# Altium PCB PCB1.PcbDoc
Units mm, origin at the board's own origin, x right, y up, seen from the top; angles counter-clockwise.
Board outline 81.23 x 45.54 mm, 2 copper layers (Top Layer, Bottom Layer); 23 components, 19 nets, 63 pads, 0 vias.
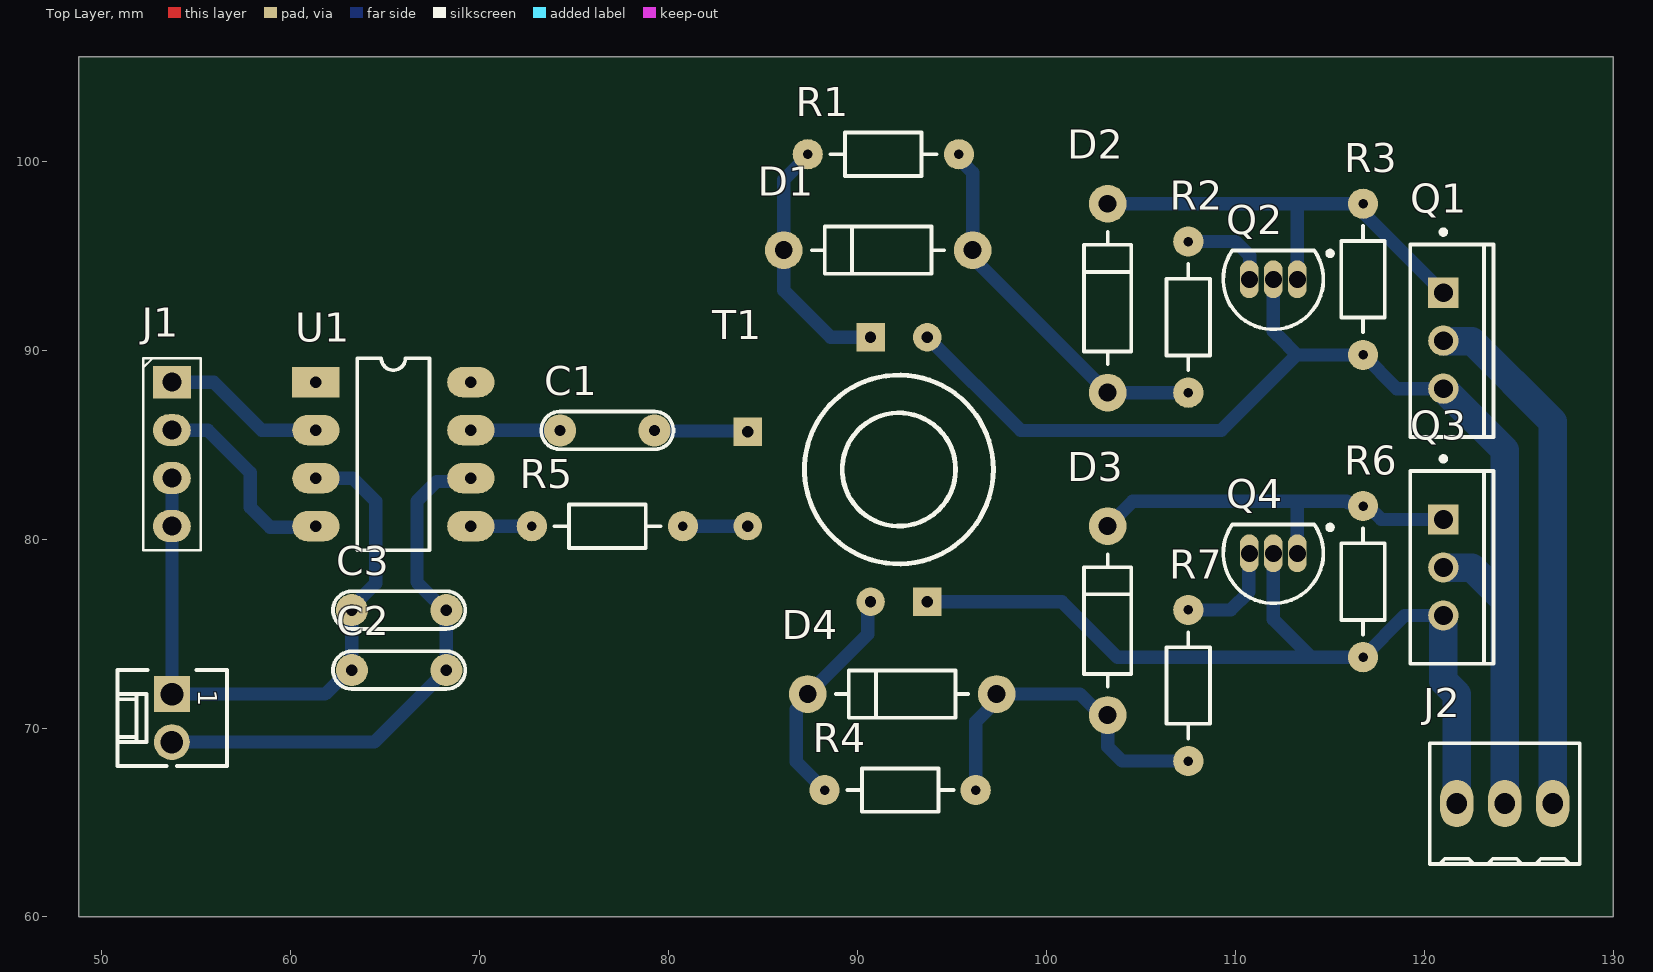
[diagram p0: Top Layer view]
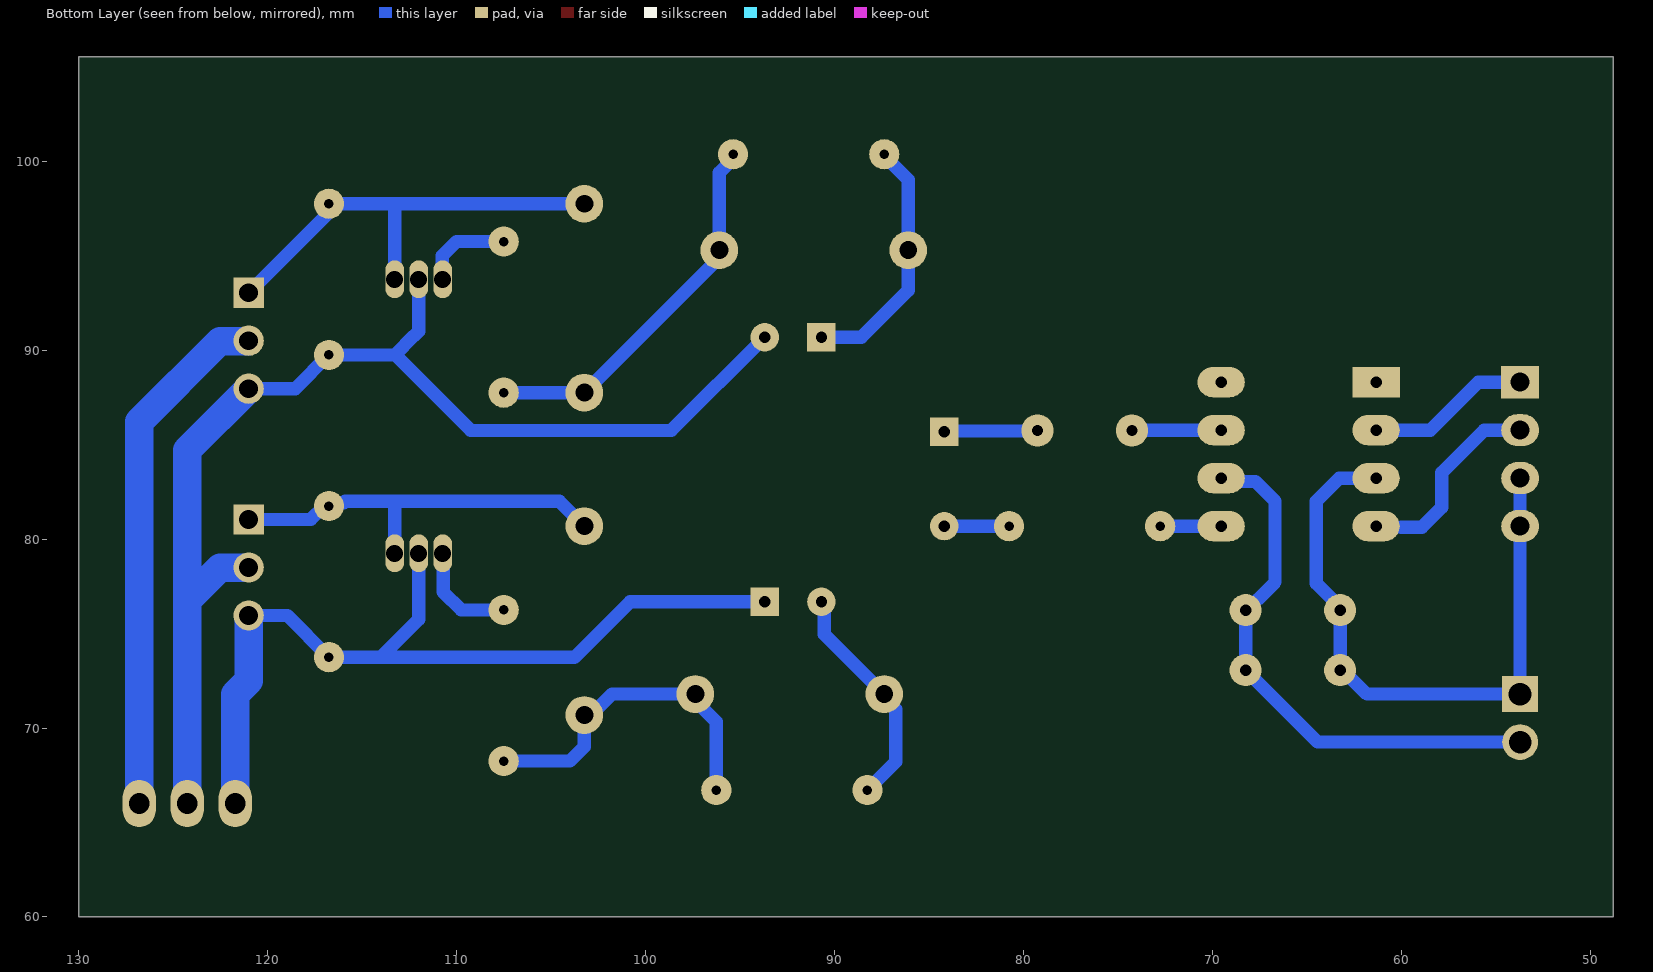
[diagram p1: Bottom Layer view, seen from below]

## Layer stack, top to bottom
Top Solder: solder mask 0.0102, Solder Resist, Dk 3.5
Top Layer: signal copper 0.0356
Dielectric 1: dielectric 0.32, FR-4, Dk 4.8
Bottom Layer: signal copper 0.0356
Bottom Solder: solder mask 0.0102, Solder Resist, Dk 3.5

## Board outline
48.768,60 48.768,105.537 130,105.537 130,60

## Design rules (kind name [scope] priority, off if disabled: settings)
Clearance [All] p1: gap=0.4 ignorepadtopadclearanceinfootprint=TRUE
PolygonConnect [All] p1: connectstyle=Relief reliefconductorwidth=0.254 reliefentries=4 polygonreliefangle="90 Angle" airgapwidth=0.5
RoutingVias [All] p1: holewidth=0.711 width=1.27 viastyle="Through Hole" minholewidth=0.711 minwidth=1.27 maxholewidth=0.711 maxwidth=1.27
SolderMaskExpansion [All] p1: expansion=0.102 istentingtop=FALSE
Width [All] p1: maxlimit=2 minlimit=0.7 preferedwidth=0.8
30 further rules are at their usual default settings.

## Components (designator, comment, footprint, x,y, rotation, side; value= is the part's Value field where it differs from the comment)
C1 "CAP_THT_0805" Cap_THT_0805 74.25,85.75 r0 top value=1u
C2 "CAP_THT_0805" Cap_THT_0805 63.23,73.065 r0 top value=1u
C3 "CAP_THT_0805" Cap_THT_0805 63.23,76.24 r0 top value=0.1u
D1 "1N5819" DO-41 96.09,95.29 r180 top
D2 "1N5819" DO-41 103.235,87.75 r90 top
D3 "1N5819" DO-41 103.235,70.685 r90 top
D4 "1N5819" DO-41 97.36,71.795 r180 top
J1 "Header 1x4 2.54mm" "Header 1x4 2.54mm" 53.705,88.305 r270 top
J2 "282834-3" "TE 282834-3" 124.25,66 r180 top
Q1 "IRFB18N50KPBF" TO-220 121,93.04 r0 top
Q2 "C2331" TO-92 113.27,93.75 r90 top
Q3 "IRFB18N50KPBF" TO-220 121,81.04 r0 top
Q4 "C2331" TO-92 113.27,79.25 r90 top
R1 "RES" RES_0.25W 87.36,100.37 r0 top value=8
R2 "RES" RES_0.25W 107.5,87.75 r90 top value=1k
R3 "RES" RES_0.25W 116.75,89.75 r90 top value=10k
R4 "RES" RES_0.25W 88.25,66.715 r0 top value=8
R5 "RES" RES_0.25W 72.755,80.685 r0 top value=0
R6 "RES" RES_0.25W 116.75,73.75 r90 top value=10k
R7 "RES" RES_0.25W 107.5,68.25 r90 top value=1k
T1 "NxNxN" Trans2 92.185,83.685 r0 top
U1 "IR4427PBF" DIP8 61.325,88.305 r0 top
? "KK®" MOLEX_22-27-2021 53.705,70.525 r270 top

## Footprints (in the part's own frame and the unit in brackets; to place one, negate y for a bottom-side part, rotate by r counter-clockwise, add the part's x,y. Pads: shape width x height; smd on the part's side, far side on the other; paste and mask are expansions set on the pad)
Cap_THT_0805 [mm]
  round 1.7 hole 0.6: 1(0,0) 2(5,0)
  silkscreen extent -1,-1 6,1
DIP8 [mm]
  rect 2.5x1.6 hole 0.6: 1(0,0)
  oval 2.5x1.6 hole 0.6: 2(0,-2.54) 3(0,-5.08) 4(0,-7.62) 5(8.2,-7.62) 6(8.2,-5.08) 7(8.2,-2.54) 8(8.2,0)
  silkscreen extent 2.18,-8.89 6.01,1.27, body extent -0.15,-8.64 8.42,1.02, height 4.45
DO-41 [mm]
  round 2 hole 0.95: A(0,0) K(10,0)
  silkscreen extent 1.5,-1.25 8.5,1.25
"Header 1x4 2.54mm" [mm]
  rect 1.7x2 hole 1: 1(0,0)
  oval 1.7x2 hole 1: 2(2.54,0) 3(5.08,0) 4(7.62,0)
  silkscreen extent -1.27,-1.52 8.89,1.52, body extent -1.27,-1.27 8.89,1.27, height 8.54
MOLEX_22-27-2021 [mm] "2.54mm (.100\") Pitch KK® Header, Single Row, Vertical, 2 Circuits"
  rect 1.9x1.9 hole 1.2: 1(-1.27,0.002)
  round 1.9 hole 1.2: 2(1.27,-0.002)
  silkscreen extent -2.54,-2.88 2.54,2.92, body extent -2.54,-2.88 2.54,2.92, height 11.7
RES_0.25W [mm]
  round 1.6 hole 0.5: 1(0,0) 2(8,0)
  silkscreen extent 1.2,-1.15 6.83,1.15
"TE 282834-3" [mm]
  oval 1.75x2.5 hole 1.1: 1(-2.54,0) 2(0,0) 3(2.54,0)
  silkscreen extent -3.97,-3.2 3.97,3.2, body extent -4.04,-3.25 4.04,3.25, height 10
TO-92 [mm]
  oval 2x1 hole 0.9: 1(0,0) 2(0,1.27) 3(0,2.54)
  silkscreen extent -2.65,-1.86 1.52,3.92, body extent -2.33,-1.05 1.42,3.78, height 7.3
TO-220 [mm]
  round 1.6 hole 1: D(0,-2.54) S(0,-5.08)
  rect 1.6x1.6 hole 1: G(0,0)
  silkscreen extent -1.75,-7.64 2.65,3.33, body extent -1.75,-7.64 2.65,2.56, height 20.7
Trans2 [mm]
  rect 1.5x1.5 hole 0.6: 1(-8,2) 3(-1.5,7) 6(1.5,-7)
  round 1.5 hole 0.6: 2(-8,-3) 4(1.5,7) 5(-1.5,-7)
  silkscreen extent -5,-5 5,5

## Part data
J1: library part "Header 1x4"
J2: "TERM BLK 3P SIDE ENT 2.54MM PCB", Color=Green, Current=10A, Manufacturer="TE Connectivity AMP Connectors", Supplier Part Number 1=A98334-ND, Voltage=150V, ComponentLink1Description=Datasheet, ComponentLink1URL=https://www.te.com/commerce/DocumentDelivery/DDEController?Action=srchrtrv&DocNm=282834&DocType=Customer+Drawing&DocLang=English, ComponentLink2Description="DigiKey Link", ComponentLink2URL=http://digikey.com/product-detail/en/te-connectivity-amp-connectors/282834-3/A98334-ND/1153264, LastUpdated="15.01.2020 4:15:50", Lifecycle Status=Active, Mating Orientation="Horizontal with Board", Minimum Order=1, Mounting Type="Through Hole", Number of Levels=1, Packaging=Bulk, Part Number=282834-3, Part Status=Active, Pitch="0.100\" (2.54mm)", Positions Per Level=3, Price=2.01, Series=Buchanan, Supplier 1=DigiKey, Wire Gauge="16-30 AWG", Wire Termination="Screw - Rising Cage Clamp"
Q1 Q3: library part NMOS, "N-channel mosfet transistor"
T1: library part "Transformer 1x2"
?: library part MOLEX_22-27-2021, "Connector 2 Male", Manufacturer=MOLEX, Manufacturer Part Number=22-27-2021, Author="CERN DEM JLC", Component Type=Standard, ComponentHeight=11.7mm, CreateDate=04.12.2008, Family=KK®, HelpURL=\\cern.ch\dfs\Applications\Altium\Datasheets\MOLEX_22-27-2021.pdf, LatestRevisionDate=04.12.2008, Mounted=Yes, Part Description="2.54mm (.100\") Pitch KK® Wire-to-Board Header, Vertical, with Friction Lock, 2 Circuits, Tin (Sn) Plating", Part Number=MOLEX_22-27-2021, Pin Count=2, PressFit=No, Sense=No, SMD=No, Socket=No, Status=None

## Nets (pads, with @x,y where several pads share a name; then routed paths per layer and width w, separated by ;. In a path a pad name is that pad's centre, name@x,y a point inside that pad or via, vN(x,y) a via of type N, cw(c..) or ccw(c..) an arc to the next point about the centre after c; other vN are vias at no path point)
GND: ?.1 C2.1 C3.1 J1.3 J1.4 U1.3 | length 34.6
  Bottom Layer w0.7: J1.3 J1.4 53.706,80.684 53.706,71.796 ?.1 61.813,71.795 63.083,73.065 C2.1 C3.1 63.23,76.387 64.5,77.657 64.5,82 63.275,83.225 U1.3
NetC1_1: C1.1 U1.7 | length 4.7
  Bottom Layer w0.7: U1.7 69.532,85.757 74.243,85.757 C1.1
NetC1_2: C1.2 T1.1 | length 5
  Bottom Layer w0.7: C1.2 79.283,85.717 84.153,85.717 T1.1
NetD1_A: D1.A D2.A R1.2 R2.1 | length 20.1
  Bottom Layer w0.7: R1.2 95.36,100.126 96.09,99.396 D1.A 96.339,95.041 96.339,94.646 D2.A R2.1
NetD1_K: D1.K R1.1 T1.3 | length 13.4
  Bottom Layer w0.7: R1.1 87.36,100.294 86.09,99.024 D1.K 86.09,93.16 88.565,90.685 T1.3
NetD2_K: D2.K Q1.G Q2.1 R3.2 | length 24
  Bottom Layer w0.7: D2.K 113.25,97.75 ; Q2.1 113.27,97.73 113.25,97.75 ; Q1.G 116.922,97.118 116.922,97.578 R3.2 113.25,97.75
NetD3_A: D3.A D4.A R4.2 R7.1 | length 18.1
  Bottom Layer w0.7: R4.2 96.25,70.333 97.36,71.443 D4.A 101.773,71.795 102.883,70.685 D3.A 103.235,69.015 104,68.25 R7.1
NetD3_K: D3.K Q3.G Q4.1 R6.2 | length 21.5
  Bottom Layer w0.7: D3.K 104.55,82 113.27,82 ; Q4.1 113.27,82 ; Q3.G 117.704,81.04 116.994,81.75 R6.2 116.578,81.922 115.968,81.922 115.89,82 113.27,82
NetD4_K: D4.K R4.1 T1.5 | length 12.2
  Bottom Layer w0.7: R4.1 86.75,68.215 86.75,71 87.36,71.61 D4.K 90.532,74.967 90.532,76.532 T1.5
NetJ1_1: J1.1 U1.2 | length 8.7
  Bottom Layer w0.7: J1.1 55.92,88.305 58.46,85.765 U1.2
NetJ1_2: J1.2 U1.4 | length 9.5
  Bottom Layer w0.7: J1.2 55.61,85.765 57.85,83.525 57.85,81.675 58.9,80.625 60,80.625
NetJ2_1: J2.1 Q1.D | length 27.8
  Bottom Layer w1.5: Q1.D 121.019,90.481 122.519,90.481 126.79,86.21 J2.1
NetJ2_2: J2.2 Q1.S Q2.2 Q3.D R3.1 T1.4 | length 63.6
  Bottom Layer w0.7: T1.4 98.62,85.75 109.25,85.75 113.25,89.75 ; Q2.2 112,91 112.249,90.751 112.25,90.75 113.25,89.75 ; Q1.S 118.54,87.96 R3.1 113.25,89.75
  Bottom Layer w1.5: Q3.D 121.019,78.481 122.519,78.481 124.25,76.75 ; Q1.S 124.25,84.71 124.25,76.75 ; J2.2 124.25,76.75
NetJ2_3: J2.3 Q3.S Q4.2 R6.1 T1.6 | length 46
  Bottom Layer w0.7: T1.6 100.815,76.685 103.75,73.75 114,73.75 ; Q4.2 112,75.75 114,73.75 ; Q3.S 118.96,75.96 R6.1 114,73.75
  Bottom Layer w1.5: Q3.S 121,72.5 121.71,71.79 J2.3
NetQ2_3: Q2.3 R2.2 | length 4.8
  Bottom Layer w0.7: R2.2 110,95.75 110.75,95 110.75,93.77 Q2.3
NetQ4_3: Q4.3 R7.2 | length 5.7
  Bottom Layer w0.7: R7.2 109.75,76.25 110.7,77.2 110.7,79.22 Q4.3
NetR5_1: R5.1 U1.5 | length 3.2
  Bottom Layer w0.7: U1.5 R5.1
NetR5_2: R5.2 T1.2 | length 3.4
  Bottom Layer w0.7: R5.2 T1.2
Vs: ?.2 C2.2 C3.2 U1.6 | length 28.2
  Bottom Layer w0.7: ?.2 64.42,69.255 C2.2 C3.2 ; C3.2@67.603,76.797 66.675,77.725 66.675,82 67.728,83.053 69.353,83.053 U1.6
pads on no net: U1.1 U1.8

## Silkscreen, mask and mechanical layers (free items; w line width, h text height)
Board:
  the board outline again, w0.254

## Text inside footprints (layer, text, board x,y; h text height)
?: Top Overlay "1" at 55.102,72.015 h1 r270; Bottom 3D Body "1" at 55.102,72.015 h1 r270